# Altium PCB BOARD.PcbDoc
Units mm, origin at the board's own origin, x right, y up, seen from the top; angles counter-clockwise.
Board outline 100 x 50 mm, 2 copper layers (Top Layer, Bottom Layer); 33 components, 28 nets, 123 pads, 30 vias.
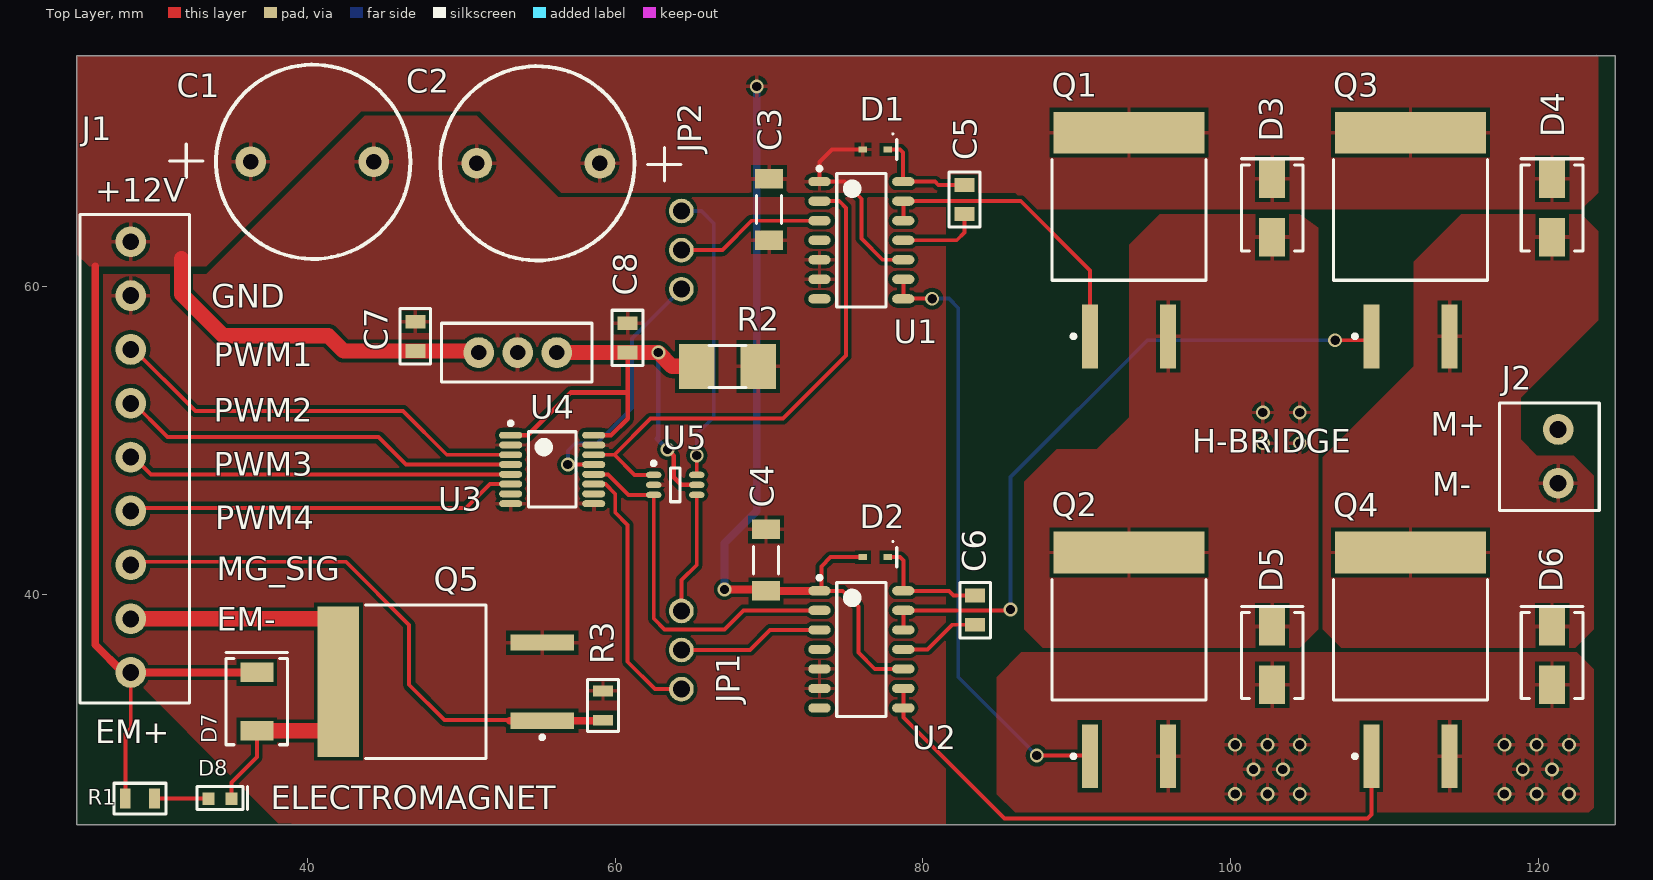
[diagram p0: Top Layer view]
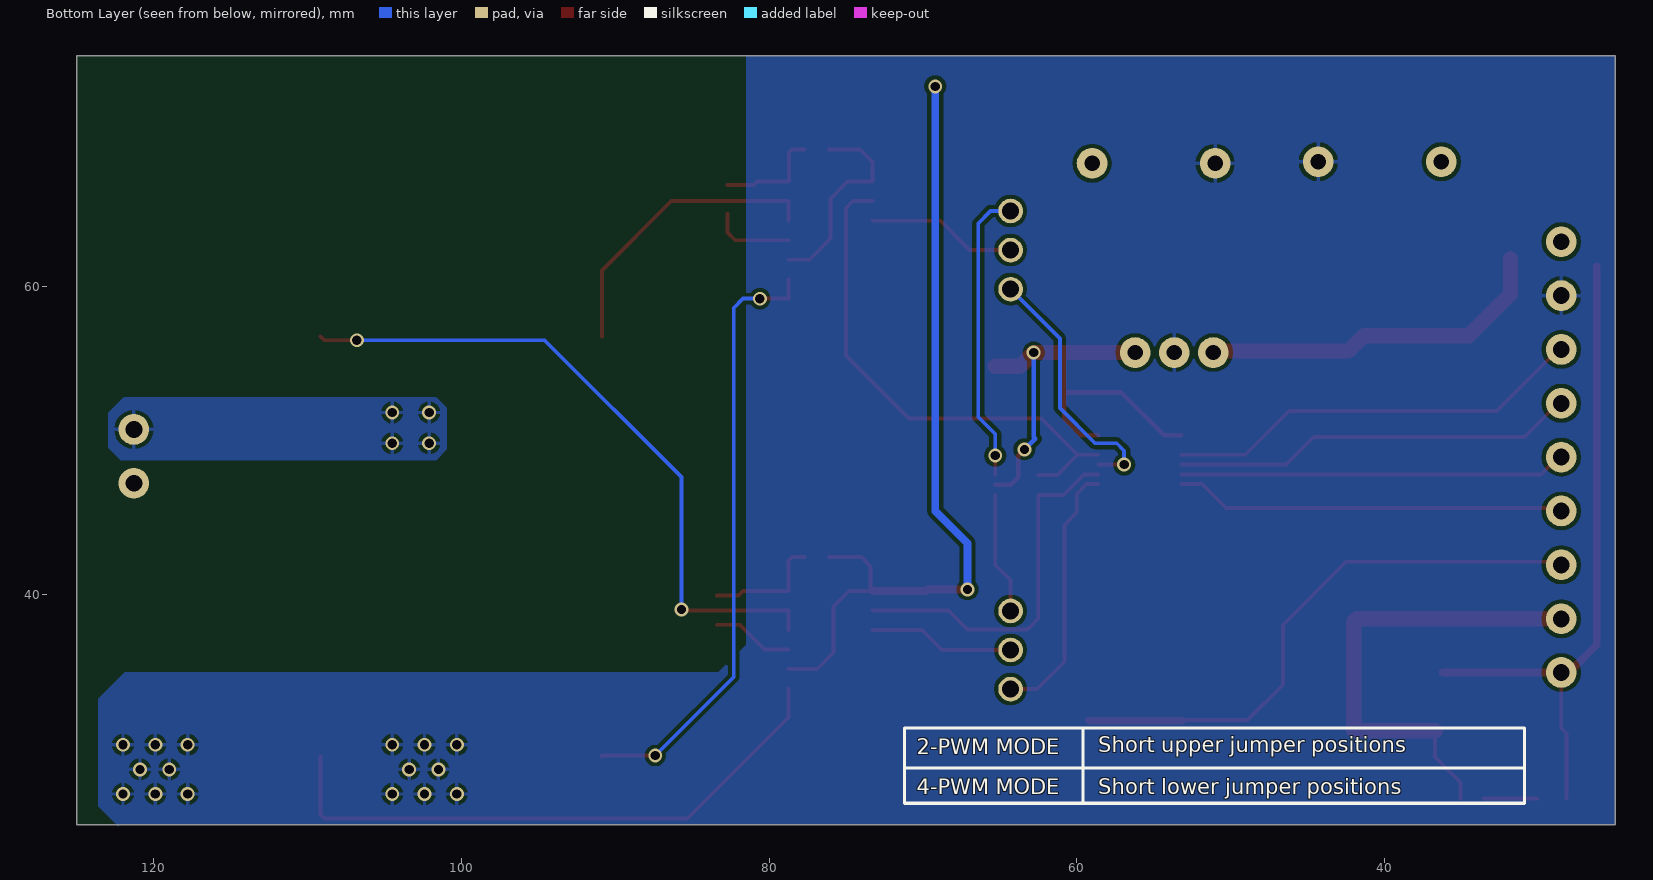
[diagram p1: Bottom Layer view, seen from below]
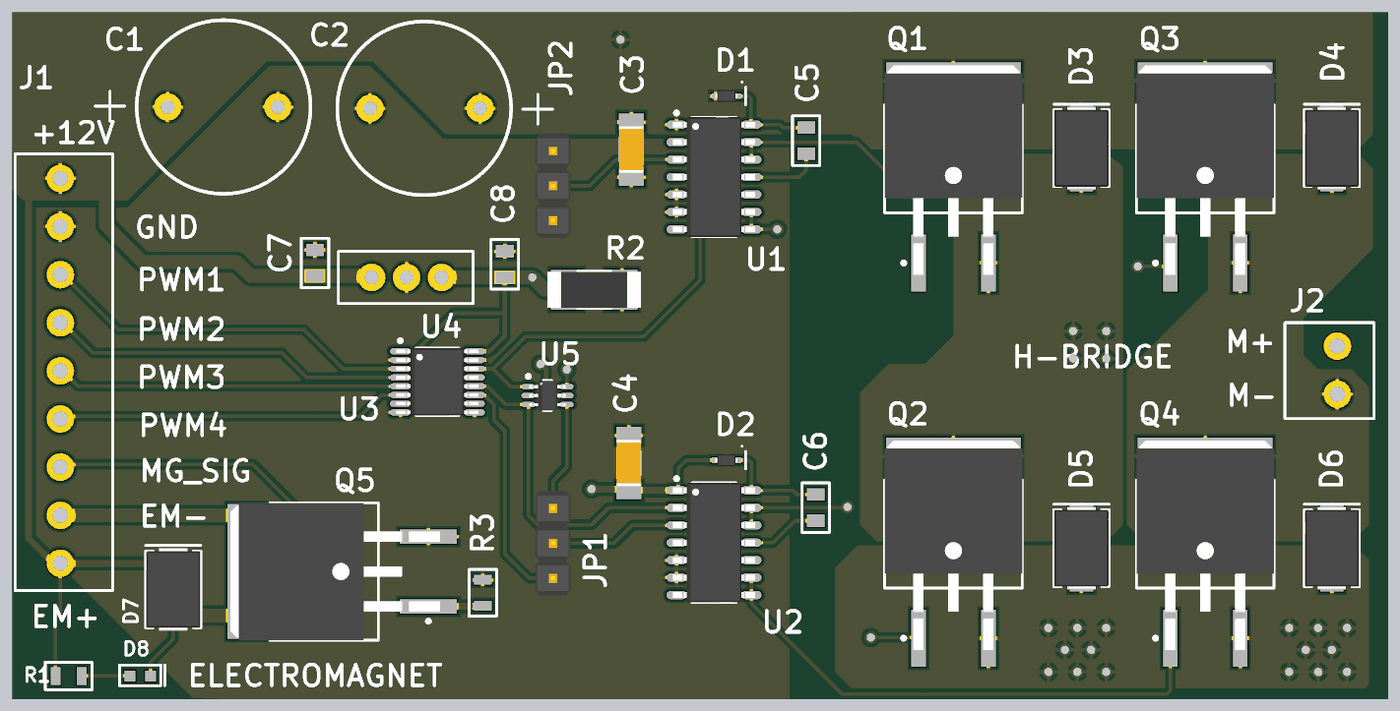
[diagram p2: 3D render of the assembled board from above, using the file's embedded part models]

## Layer stack, top to bottom
Top Solder: solder mask 0.0102, Solder Resist, Dk 3.5
Top Layer: signal copper 0.0356
Dielectric 1: dielectric 0.32, FR-4, Dk 4.8
Bottom Layer: signal copper 0.0356
Bottom Solder: solder mask 0.0102, Solder Resist, Dk 3.5

## Board outline
25,25 125,25 125,75 25,75

## Design rules (kind name [scope] priority, off if disabled: settings)
Clearance [All] p1: gap=0.254 ignorepadtopadclearanceinfootprint=FALSE except(0: Arc-Hole Track-Hole SMDPad-Hole THPad-Hole Via-Hole Fill-Hole Poly-Hole Region-Hole Text-Hole; 0.1: SMDPad-SMDPad SMDPad-THPad THPad-THPad)
ComponentClearance [All] p1: gap=0 collisioncheckmode=3 verticalgap=2540 showdistances=FALSE
PolygonConnect [All] p1: connectstyle=Relief reliefconductorwidth=0.254 reliefentries=4 polygonreliefangle="90 Angle" airgapwidth=0.254
RoutingVias [All] p1: holewidth=0.711 width=1.27 viastyle="Through Hole" minholewidth=0.711 minwidth=1.27 maxholewidth=0.711 maxwidth=1.27
SolderMaskExpansion [All] p1: expansion=0.102
Width [All] p1: maxlimit=2 minlimit=0.254 preferedwidth=0.254
29 further rules are at their usual default settings.

## Components (designator, comment, footprint, x,y, rotation, side; value= is the part's Value field where it differs from the comment)
C1 "UVR2A102MRD6" CAP_THRU 36.3,68.1 r0 top
C2 "UVR2A102MRD6" CAP_THRU 59,68 r180 top
C3 "C3216X5R1E106K160AB" C1206 70,65 r90 top
C4 "C3216X5R1E106K160AB" C1206 69.8,42.2 r270 top
C5 "1uF" C0805 82.7,64.7 r90 top
C6 "1uF" C0805 83.4,38 r90 top
C7 "1uF" C0805 47,57.7 r270 top
C8 "1uF" C0805 60.8,57.6 r270 top
D1 "1N4148X-TP" SOD523 76.9,68.9 r0 top
D2 "1N4148X-TP" SOD523 76.9,42.4 r0 top
D3 "CDBA540-HF" DO214-AC 102.7,65.1 r90 top
D4 "CDBA540-HF" DO214-AC 120.9,65.1 r90 top
D5 "CDBA540-HF" DO214-AC 102.7,36 r90 top
D6 "CDBA540-HF" DO214-AC 120.9,36 r90 top
D7 "S3BB-TP" DO-214AA_Diode 36.7,33 r90 top
D8 "LTST-C191TBKT-5A" LED_0603 34.3,26.7 r0 top
J1 "0393570009" 9POS_CONNECTOR 28.5,62.9 r270 top
J2 "ED555/2DS" 2POS_CONNECTOR 121.3,47.2 r90 top
JP1 "732-5316-ND" 3PIN_HEADER 64.3,36.36 r270 top
JP2 "732-5316-ND" 3PIN_HEADER 64.3,62.36 r90 top
Q1 "IRFZ44ESTRLPBF" D2PAK 93.4,63 r90 top
Q2 "IRFZ44ESTRLPBF" D2PAK 93.4,35.7 r90 top
Q3 "IRFZ44ESTRLPBF" D2PAK 111.7,63 r90 top
Q4 "IRFZ44ESTRLPBF" D2PAK 111.7,35.7 r90 top
Q5 "IRFZ44ESTRLPBF" D2PAK 49,34.3 r180 top
R1 "1k" R0805 29.1,26.7 r180 top
R2 "50R" R2512 67.3,54.8 r180 top
R3 "1k" R0805 59.2,32.75 r270 top
U1 "LT1160IS#PBF" SOIC-14 76,63 r0 top
U2 "LT1160IS#PBF" SOIC-14 76,36.4 r0 top
U3 "SI8645BA-B-IUR" QSOP-16 55.9,48.1 r0 top
U4 "DCDC" DCDC 51.12,55.7 r0 top
U5 "NC7WZ14P6X" TSOP-6 63.9,47.1 r0 top

## Footprints (in the part's own frame and the unit in brackets; to place one, negate y for a bottom-side part, rotate by r counter-clockwise, add the part's x,y. Pads: shape width x height; smd on the part's side, far side on the other; paste and mask are expansions set on the pad)
2POS_CONNECTOR [mm]
  round 2 hole 1.1: 1(0,0) 2(3.5,0)
  silkscreen extent -1.78,-2.67 5.21,3.81
3PIN_HEADER [mm]
  round 1.6 hole 1.1: 1(-2.54,0) 2(0,0) 3(2.54,0)
  body extent -3.81,-1.27 3.81,1.27, height 9.5
9POS_CONNECTOR [mm]
  round 2 hole 1.1: 1(0,0) 2(3.5,0) 3(7,0) 4(10.5,0) 5(14,0) 6(17.5,0) 7(21,0) 8(24.511,0) 9(28,0)
  silkscreen extent -1.78,-3.3 29.97,3.81
C0805 [mm]
  rect 0.9x1.3 smd: 1(0,0) 2(1.9,0)
  silkscreen extent -0.85,-1 2.75,1
C1206 [mm] "Chip Capacitor, 2-Leads, Body 3.20x1.60mm, IPC Medium Density"
  rect 1.27x1.82 smd: 1(-2,0) 2(2,0)
  silkscreen extent -0.9,-0.81 0.9,0.81, body extent -1.7,-0.9 1.7,0.9, height 1.8
CAP_THRU [mm]
  round 2 hole 1: 1(0,0) 2(8,0)
  silkscreen extent -5.27,-6.31 10.38,6.31
D2PAK [mm]
  rect 4.15x1.05 smd: 1(-6.25,2.54) 3(-6.25,-2.54)
  rect 2.7x9.8 smd: 2(7,0)
  silkscreen extent -6.37,-5 5.25,5, body extent -7.1,-5 8.14,5, height 4.83
DCDC [mm]
  round 2 hole 1: 1(0,0) 2(2.54,0) 3(5.08,0)
  silkscreen extent -2.41,-1.91 7.37,1.91
DO214-AC [mm]
  rect 2.5x1.7 smd: 1(-1.9,0) 2(1.9,0)
  silkscreen extent -2.8,-2 3.2,2, body extent -3.02,-1.97 3.02,1.97, height 2.62
DO-214AA_Diode [mm] "Molded Diode, 2-Leads, Body 5.33x3.62mm, IPC Medium Density"
  rect 1.27x2.15 smd: 1(-1.9,0) 2(1.9,0)
  silkscreen extent -2.8,-2 3.2,2, body extent -3.02,-1.97 3.02,1.97, height 2.62
LED_0603 [mm]
  rect 0.8x0.8 smd: 1(-0.75,0) 2(0.75,0)
  silkscreen extent -1.5,-0.7 1.8,0.8
QSOP-16 [mm] "SOP, 16-Leads, Body 4.89x3.90mm, Pitch 0.64mm, IPC Medium Density"
  oval 1.5x0.45 smd: 1(-2.7,2.222) 2(-2.7,1.587) 3(-2.7,0.953) 4(-2.7,0.318) 5(-2.7,-0.318) 6(-2.7,-0.953) 7(-2.7,-1.587) 8(-2.7,-2.222) 9(2.7,-2.222) 10(2.7,-1.587) 11(2.7,-0.953) 12(2.7,-0.318) 13(2.7,0.318) 14(2.7,0.953) 15(2.7,1.587) 16(2.7,2.222)
  silkscreen extent -2.82,-2.45 1.55,3.12, body extent -3,-2.45 3,2.45, height 1.75
R0805 [mm]
  rect 0.7x1.3 smd: 1(-0.95,0) 2(0.95,0)
  silkscreen extent -1.7,-1 1.7,1
R2512 [mm] "Chip Resistor, 2-Leads, Body 6.30x2.50mm, IPC Medium Density"
  rect 2.29x2.92 smd: 1(-2,0) 2(2,0)
  silkscreen extent -1.2,-1.36 1.2,1.36, body extent -3.4,-1.3 3.4,1.3, height 2.79
SOD523 [mm] "SODFL, 2-Leads, Body 0.80x1.60mm, IPC Medium Density"
  rect 0.55x0.4 smd: 1(-0.8,0) 2(0.8,0)
  silkscreen extent 1.09,-0.64 1.4,1.07, body extent -0.8,-0.43 0.8,0.43, height 0.77
SOIC-14 [mm] "SOIC, 14-Leads, Body 8.65x3.90mm, Pitch 1.27mm, IPC Medium Density"
  oval 1.45x0.6 smd: 1(-2.725,3.81) 2(-2.725,2.54) 3(-2.725,1.27) 4(-2.725,0) 5(-2.725,-1.27) 6(-2.725,-2.54) 7(-2.725,-3.81) 8(2.725,-3.81) 9(2.725,-2.54) 10(2.725,-1.27) 11(2.725,0) 12(2.725,1.27) 13(2.725,2.54) 14(2.725,3.81)
  silkscreen extent -2.85,-4.35 1.6,4.78, body extent -3,-4.35 3,4.35, height 1.75
TSOP-6 [mm] "TSOP, 6-Leads, Body 2.00x1.25mm, Pitch 0.65mm, IPC Medium Density"
  oval 1x0.4 smd: 1(-1.4,0.65) 2(-1.4,0) 3(-1.4,-0.65) 4(1.4,-0.65) 5(1.4,0) 6(1.4,0.65)
  silkscreen extent -1.52,-1.1 0.3,1.52, body extent -1.33,-1.1 1.33,1.1, height 0.8

## Part data
C1 C2: "CAP Electrolytic 1000uF 100V", Capacitance=1000uF, Case/Package=Radial, Manufacturer=Nichicon, Max Operating Temperature=85°C, Min Operating Temperature=-40°C, Package Quantity=50, Ripple Current=1.38A, Supplier Part Number 1=493-14310-ND, Tolerance=20%, Voltage Rating=100V, ComponentLink1Description=http://www.mouser.com/ds/2/293/e-uvr-1076495.pdf, ComponentLink1URL=http://www.mouser.com/ds/2/293/e-uvr-1076495.pdf, ComponentLink2Description=http://nichicon-us.com/english/products/pdfs/e-uvr.pdf, ComponentLink2URL=http://nichicon-us.com/english/products/pdfs/e-uvr.pdf, Dissipation Factor=0.08%, Lead/Base Style=Straight, Lead Pitch=7.5mm, Length=35mm, Life (Hours)=2000Hour, Manufacturer Part Number=UVR2A102MRD6, Mount="Through Hole", Packaging=Bulk, Polarity=Polar, Pricing 1="1=1.84, 10=1.492, 100=1.1391, 500=0.8679, 1000=0.7594, 2500=0.7323, 5000=0.7052 (USD)", Stock 1=1438, Supplier 1=Digi-Key, Termination=Radial, Voltage Rating (DC)=100V
C3 C4: "CAP MLCC 10µF ±10% 25V X5R Ceramic Capacitor -55°C ~ 85°C Surface Mount, MLCC 1206 (3216 Metric) 0.126\" L x 0.063\" W (3.20mm x 1.60mm)", Capacitance=10uF, Case/Package=1206, Case Code (Metric)=3216, Dielectric=X5R, Dielectric Material=Ceramic, Manufacturer=TDK, Max Operating Temperature=85°C, Min Operating Temperature=-55°C, Package Quantity=2000, Supplier Part Number 1=445-6862-1-ND, Tolerance=10%, Voltage Rating=25V, Case Code (Imperial)=1206, ComponentLink1Description=https://datasheet.ciiva.com/6276/tdkmlcccaprange-6276583.pdf, ComponentLink1URL=https://datasheet.ciiva.com/6276/tdkmlcccaprange-6276583.pdf, ComponentLink2Description=https://datasheet.ciiva.com/17487/e412-c-17487288.pdf, ComponentLink2URL=https://datasheet.ciiva.com/17487/e412-c-17487288.pdf, ComponentLink3Description=https://datasheet.ciiva.com/24217/c3216x5r1e106k160ab-265309-24217784.pdf, ComponentLink3URL=https://datasheet.ciiva.com/24217/c3216x5r1e106k160ab-265309-24217784.pdf, ComponentLink4Description=https://datasheet.ciiva.com/6276/tdkmlcccaprange-6276585.pdf, ComponentLink4URL=https://datasheet.ciiva.com/6276/tdkmlcccaprange-6276585.pdf, ComponentLink5Description=https://datasheet.ciiva.com/6276/tdkmlcccaprange-6276587.pdf, ComponentLink5URL=https://datasheet.ciiva.com/6276/tdkmlcccaprange-6276587.pdf, Composition=Ceramic, Depth=1.6mm, Height=1.6mm, Lead Free="Lead Free", Length=3.2mm, Manufacturer Part Number=C3216X5R1E106K160AB, Mount="Surface Mount", Number of Pins=2, Packaging="Tape and Reel", Pricing 1="1=0.83, 10=0.589, 100=0.3881, 500=0.2875, 1000=0.2444 (USD)", Radiation Hardening=No, Stock 1=3130, Supplier 1=Digi-Key, Termination=SMD/SMT, Thickness=0.075inch, Voltage Rating (DC)=25V, Weight=0.000571oz, Width=0.063inch
C5 C6: library part GCM21BR71E105KA56L, "CAP MLCC 1UF 25V X7R 0805", Case/Package=0805, Case Code (Metric)=2012, Dielectric=X7R, Manufacturer=Murata, Max Operating Temperature=125°C, Min Operating Temperature=-55°C, Package Quantity=3000, Supplier Part Number 1=490-4785-1-ND, Tolerance=10%, Voltage=25V, Capacitance=1uF, Case Code (Imperial)=0805, ComponentLink1Description=https://datasheet.ciiva.com/137/product-137200.pdf, ComponentLink1URL=https://datasheet.ciiva.com/137/product-137200.pdf, ComponentLink2Description=https://datasheet.ciiva.com/3778/359gcm21br71e105ka5623-3778560.pdf, ComponentLink2URL=https://datasheet.ciiva.com/3778/359gcm21br71e105ka5623-3778560.pdf, ComponentLink3Description=https://datasheet.ciiva.com/16624/product-16624576.pdf, ComponentLink3URL=https://datasheet.ciiva.com/16624/product-16624576.pdf, ComponentLink4Description=https://datasheet.ciiva.com/18183/getdatasheetpartid-153106-18183696.pdf, ComponentLink4URL=https://datasheet.ciiva.com/18183/getdatasheetpartid-153106-18183696.pdf, ComponentLink5Description=https://datasheet.ciiva.com/137/product-137201.pdf, ComponentLink5URL=https://datasheet.ciiva.com/137/product-137201.pdf, ComponentLink6Description=https://datasheet.ciiva.com/11789/0900766b80ef92d0-11789092.pdf, ComponentLink6URL=https://datasheet.ciiva.com/11789/0900766b80ef92d0-11789092.pdf, ComponentLink7Description=https://datasheet.ciiva.com/2989/product-2989245.pdf, ComponentLink7URL=https://datasheet.ciiva.com/2989/product-2989245.pdf, ComponentLink8Description=https://datasheet.ciiva.com/2989/product-2989246.pdf, ComponentLink8URL=https://datasheet.ciiva.com/2989/product-2989246.pdf, ComponentLink9Description=https://datasheet.ciiva.com/137/product-137199.pdf, ComponentLink9URL=https://datasheet.ciiva.com/137/product-137199.pdf, Depth=1.25mm, Height=1.25mm, Lead Free="Lead Free", Length=2mm, Manufacturer Part Number=GCM21BR71E105KA56L, Mount="Surface Mount", Packaging="Tape and Reel", Pricing 1="1=0.25, 10=0.171, 100=0.0865, 500=0.0592, 1000=0.0524 (USD)", Radiation Hardening=No, REACH SVHC="No SVHC", Stock 1=30000, Supplier 1=Digi-Key, Termination=SMD/SMT, Thickness=0.055inch, Voltage Rating=25V, Voltage Rating (DC)=25V, Width=0.049inch
C7 C8: library part 0805ZC105KAT2A, "CAP CER 1UF 10V X7R 0805", Case/Package=0805, Case Code (Metric)=2012, Dielectric=X7R, Insulation Resistance=100GR, Manufacturer="Kyocera AVX", Max Operating Temperature=125°C, Min Operating Temperature=-55°C, Package Quantity=1, Supplier Part Number 1=478-1405-1-ND, Tolerance=10%, Voltage=10V, Capacitance=1uF, Case Code (Imperial)=0805, ComponentLink1Description=https://datasheet.ciiva.com/2988/cx7r-2988071.pdf, ComponentLink1URL=https://datasheet.ciiva.com/2988/cx7r-2988071.pdf, ComponentLink2Description=https://datasheet.ciiva.com/2988/cx7r-2988072.pdf, ComponentLink2URL=https://datasheet.ciiva.com/2988/cx7r-2988072.pdf, ComponentLink3Description=https://datasheet.ciiva.com/14601/70001075-14601048.pdf, ComponentLink3URL=https://datasheet.ciiva.com/14601/70001075-14601048.pdf, ComponentLink4Description=https://datasheet.ciiva.com/14594/70001075-14594329.pdf, ComponentLink4URL=https://datasheet.ciiva.com/14594/70001075-14594329.pdf, ComponentLink5Description=https://datasheet.ciiva.com/25901/cx7r-25901193.pdf, ComponentLink5URL=https://datasheet.ciiva.com/25901/cx7r-25901193.pdf, ComponentLink6Description=https://datasheet.ciiva.com/15165/getdatasheetpartid-71567-15165451.pdf, ComponentLink6URL=https://datasheet.ciiva.com/15165/getdatasheetpartid-71567-15165451.pdf, ComponentLink7Description=https://datasheet.ciiva.com/151/cx7r-151916.pdf, ComponentLink7URL=https://datasheet.ciiva.com/151/cx7r-151916.pdf, ComponentLink8Description=https://datasheet.ciiva.com/151/cx7r-151917.pdf, ComponentLink8URL=https://datasheet.ciiva.com/151/cx7r-151917.pdf, ComponentLink9Description=https://datasheet.ciiva.com/151/cx7r-151918.pdf, ComponentLink9URL=https://datasheet.ciiva.com/151/cx7r-151918.pdf, ComponentLink10Description=https://datasheet.ciiva.com/11787/0900766b80ed4be2-11787102.pdf, ComponentLink10URL=https://datasheet.ciiva.com/11787/0900766b80ed4be2-11787102.pdf, ComponentLink11Description=https://datasheet.ciiva.com/7812/84526-7812223.pdf, ComponentLink11URL=https://datasheet.ciiva.com/7812/84526-7812223.pdf, ComponentLink12Description=https://datasheet.ciiva.com/19475/2011248-19475855.pdf, ComponentLink12URL=https://datasheet.ciiva.com/19475/2011248-19475855.pdf, Contact Plating=Tin,Matte, Depth=1.25mm, Dissipation Factor=5%, Height=1.4mm, Lead Free="Lead Free", Length=2.01mm, Manufacturer Part Number=0805ZC105KAT2A, Mount="Surface Mount,PCB", Number of Pins=2, Packaging="Tape and Reel", Pricing 1="1=0.21, 10=0.147, 100=0.069, 500=0.0484, 1000=0.0401 (USD)", Radiation Hardening=No, REACH SVHC="No SVHC", Stock 1=385183, Supplier 1=Digi-Key, Termination=SMD/SMT, Thickness=0.055inch, Voltage Rating=10V, Voltage Rating (DC)=10V, Width=1.25mm
D1 D2: "DIODE GEN PURP 75V 150MA SOD523", Average Rectified Current=150mA, Capacitance=2pF, Forward Current=300mA, Forward Voltage=1.25V, Manufacturer=MCC, Max Operating Temperature=150°C, Max Repetitive Reverse Voltage (Vrrm)=100V, Max Reverse Leakage Current=1uA, Max Reverse Voltage (DC)=75V, Max Surge Current=2A, Min Operating Temperature=-65°C, Package Quantity=1, Power Dissipation=200mW, Supplier Part Number 1=1N4148XTPMSCT-ND, ComponentLink1Description=https://datasheet.ciiva.com/911/1n4148xsod-523-911686.pdf, ComponentLink1URL=https://datasheet.ciiva.com/911/1n4148xsod-523-911686.pdf, ComponentLink2Description=https://datasheet.ciiva.com/4435/1n4148xsod-523-358-4435190.pdf, ComponentLink2URL=https://datasheet.ciiva.com/4435/1n4148xsod-523-358-4435190.pdf, ComponentLink3Description=https://datasheet.ciiva.com/911/1n4148xsod-523-911687.pdf, ComponentLink3URL=https://datasheet.ciiva.com/911/1n4148xsod-523-911687.pdf, ComponentLink4Description=https://datasheet.ciiva.com/911/1n4148xsod-523-911688.pdf, ComponentLink4URL=https://datasheet.ciiva.com/911/1n4148xsod-523-911688.pdf, ComponentLink5Description=https://datasheet.ciiva.com/16836/1n4148xsod-523-16836299.pdf, ComponentLink5URL=https://datasheet.ciiva.com/16836/1n4148xsod-523-16836299.pdf, Current Rating=150mA, Element Configuration=Single, Lead Free="Lead Free", Manufacturer Part Number=1N4148X-TP, Mount="Surface Mount", Number of Pins=2, Output Current=300mA, Packaging="Tape and Reel", Peak Non-Repetitive Surge Current=2A, Polarity=Standard, Pricing 1="1=0.14, 10=0.131, 100=0.0856, 500=0.0419, 1000=0.0285 (USD)", Radiation Hardening=No, Recovery Time=4ns, Reverse Recovery Time=4ns, Stock 1=978848, Supplier 1=Digi-Key, Voltage Rating (DC)=75V
D3 D4 D5 D6: "DIODE Schottky Diodes & Rectifiers 40V, 5A", Average Rectified Current=5A, Manufacturer=Comchip, Max Reverse Voltage (DC)=40V, Supplier Part Number 1=641-1707-1-ND, ComponentLink1Description=http://www.mouser.com/ds/2/80/CDBA520-HF%20Thru134737.%20CDBA5200-HF%20RevB-221146.pdf, ComponentLink1URL=http://www.mouser.com/ds/2/80/CDBA520-HF%20Thru134737.%20CDBA5200-HF%20RevB-221146.pdf, ComponentLink2Description=http://www.comchiptech.com/cms/UserFiles/CDBA540-HF%20Thru505315.%20CDBA5200-HF%20RevC.pdf, ComponentLink2URL=http://www.comchiptech.com/cms/UserFiles/CDBA540-HF%20Thru505315.%20CDBA5200-HF%20RevC.pdf, Manufacturer Part Number=CDBA540-HF, Mount="Surface Mount", Packaging="Tape and Reel", Pricing 1="1=0.49, 10=0.381, 100=0.2612, 500=0.1791, 1000=0.1343 (USD)", Stock 1=61079, Supplier 1=Digi-Key
D7: "DIODE GEN PURP 100V 3A DO214AA", Average Rectified Current=3A, Forward Voltage=1.15V, Manufacturer=MCC, Max Repetitive Reverse Voltage (Vrrm)=100V, Max Surge Current=100A, Package Quantity=1, Peak Reverse Current=10uA, Supplier Part Number 1=S3BB-TPMSCT-ND, ComponentLink1Description=https://datasheet.ciiva.com/914/s3ab-s3mbsmb-914278.pdf, ComponentLink1URL=https://datasheet.ciiva.com/914/s3ab-s3mbsmb-914278.pdf, ComponentLink2Description=https://datasheet.ciiva.com/914/s3ab-s3mbsmb-914279.pdf, ComponentLink2URL=https://datasheet.ciiva.com/914/s3ab-s3mbsmb-914279.pdf, ComponentLink3Description=https://datasheet.ciiva.com/914/s3ab-s3mbsmb-914280.pdf, ComponentLink3URL=https://datasheet.ciiva.com/914/s3ab-s3mbsmb-914280.pdf, ComponentLink4Description=https://datasheet.ciiva.com/15200/getdatasheetpartid-686538-15200554.pdf, ComponentLink4URL=https://datasheet.ciiva.com/15200/getdatasheetpartid-686538-15200554.pdf, ComponentLink5Description=https://datasheet.ciiva.com/17437/s3ab-s3mbsmb-17437836.pdf, ComponentLink5URL=https://datasheet.ciiva.com/17437/s3ab-s3mbsmb-17437836.pdf, Element Configuration=Single, Lead Free="Lead Free", Manufacturer Part Number=S3BB-TP, Mount="Surface Mount", Number of Pins=2, Packaging="Tape and Reel", Peak Non-Repetitive Surge Current=100A, Pricing 1="1=0.56, 10=0.441, 25=0.372, 100=0.3028, 250=0.2509, 500=0.2076, 1000=0.1557 (USD)", Radiation Hardening=No, Reverse Voltage (DC)=100V, Stock 1=10943, Supplier 1=Digi-Key
D8: "LED BLUE CLEAR 0603 SMD", Case/Package=0603, Case Code (Metric)=1608, Colour=Blue, Forward Current=20mA, Forward Voltage=2.8V, Lens Colour=Colorless, Manufacturer="Vishay Lite-On", Max Operating Temperature=80°C, Min Operating Temperature=-20°C, Package Quantity=5000, Supplier Part Number 1=160-2212-6-ND, Test Current=5mA, Voltage=29V, Case Code (Imperial)=0603, ComponentLink1Description=http://components.arrow.com/part/dataview/52218576S9813001N1331, ComponentLink1URL=http://components.arrow.com/part/dataview/52218576S9813001N1331, ComponentLink2Description=http://optoelectronics.liteon.com/zh-cn/api/DwonloadFileHandler.ashx?txtSpecNo=DS22-2003-020&txtPartNo=LTST-C191TBKT-5A, ComponentLink2URL=http://optoelectronics.liteon.com/zh-cn/api/DwonloadFileHandler.ashx?txtSpecNo=DS22-2003-020&txtPartNo=LTST-C191TBKT-5A, Dominant Wavelength=473nm, Height=0.55mm, Illumination Colour=Blue, Length=1.6mm, Lens Style=Diffused,Colorless,Rectangular, Lens Transparency=Clear, Luminous Intensity=15mcd, Manufacturer Part Number=LTST-C191TBKT-5A, Mount="Surface Mount", Number of LEDs=1, Packaging="Tape and Reel", Pricing 1="1=0.52, 10=0.376, 25=0.2884, 100=0.1881, 250=0.138, 500=0.117, 1000=0.0961, 2500=0.0836 (USD)", Radiation Hardening=No, Stock 1=2918, Supplier 1=Digi-Key, Viewing Angle=130°, Width=0.8mm
J1: "CONN TERMINAL BLOCK 9POS 3.5MM", Colour=Black, Current=12A, Manufacturer=Molex, Max Operating Temperature=105°C, Min Operating Temperature=-40°C, Supplier Part Number 1=WM7865-ND, Voltage=300V, ComponentLink1Description=https://datasheet.ciiva.com/9364/0393570009-terminal-blocks-9364872.pdf, ComponentLink1URL=https://datasheet.ciiva.com/9364/0393570009-terminal-blocks-9364872.pdf, ComponentLink2Description=https://datasheet.ciiva.com/18620/393570005-sd-18620844.pdf, ComponentLink2URL=https://datasheet.ciiva.com/18620/393570005-sd-18620844.pdf, Contact Plating=Tin, Housing Colour=Black, Housing Material=Nylon, Manufacturer Part Number=0393570009, Mount="Through Hole", Number of Contacts=9, Number of Levels=1, Number of Positions Per Level=9, Number of Rows=1, Orientation=Straight, Packaging=Bulk, Pitch=0.138inch, Plating=Nickel, Pricing 1="1=3.12, 10=2.362, 25=2.1888, 50=1.968, 100=1.92, 250=1.68, 500=1.536, 1000=1.392, 5000=1.224 (USD)", Stock 1=4496, Supplier 1=Digi-Key, Termination=Screw, Wire Gauge (Max)=28AWG, Wire Gauge (Min)=16AWG
J2: "TERMINAL BLOCK 3.5MM 2POS PCB", Colour=Grey, Current=6A, Flammability Rating="UL94 V-0", Manufacturer="On-Shore Technology", Max Operating Temperature=105°C, Min Operating Temperature=-30°C, Supplier Part Number 1=ED1514-ND, Voltage=150V, ComponentLink1Description=https://datasheet.ciiva.com/823/ed555ds-823583.pdf, ComponentLink1URL=https://datasheet.ciiva.com/823/ed555ds-823583.pdf, Contact Material=Brass, Contact Plating=Brass, Height=8.2mm, Housing Colour=Grey, Housing Material=Nylon, Lead Free="Lead Free", Length=7mm, Manufacturer Part Number=ED555/2DS, Mount="Through Hole", Number of Levels=1, Number of Pins=2, Number of Positions=2, Number of Positions Per Level=2, Number of Rows=1, Packaging=Bulk, Pitch=0.138inch, Plating=Steel, Pricing 1="1=1.06, 10=0.658, 25=0.5632, 50=0.5064, 100=0.4959, 250=0.422, 500=0.4009, 1000=0.3587, 5000=0.2806 (USD)", Stock 1=38938, Supplier 1=Digi-Key, Termination=Screw, Width=6.2mm, Wire Gauge (Max)=28AWG, Wire Gauge (Min)=16AWG
JP1 JP2: library part 61300311121, "CONN_HeaderPins3pos WURTH ELEKTRONIK Board-To-Board Connector, Vertical, WR-PHD Series, Through Hole, Header, 3 Contacts, 2.54 mm", Case/Package=100, Colour=Black, Manufacturer="Wurth Electronics", ComponentLink1Description=http://www.farnell.com/cad/1737268.pdf, ComponentLink1URL=http://www.farnell.com/cad/1737268.pdf, Connector Type="Male Pin", Contact Material=Copper, Contact Mating Length=0.236inch, Contact Plating=Gold, Gender=Male, Lead Free="Lead Free", Manufacturer Part Number=61300311121, Mount="Through Hole", Number of Contacts=3, Number of Positions=3, Number of Rows=1, Packaging=Bulk, Pitch=0.1inch, Pricing 1="1=0.13, 10=0.106, 25=0.088, 50=0.074, 100=0.067, 1000=0.061 (USD)", REACH SVHC=Unknown, Stock 1=57026, Supplier 1=Digi-Key, Supplier Part Number 1=732-5316-ND, Termination=Solder
Q1 Q2 Q3 Q4 Q5: "MOSFET N-CH 60V 48A D2PAK", Case/Package=TO-263-3, Continuous Drain Current (ID)=48A, Drain to Source Breakdown Voltage=60V, Drain to Source Resistance=23mR, Gate to Source Voltage (Vgs)=20V, Input Capacitance=1.36nF, Manufacturer=Infineon, Max Operating Temperature=175°C, Max Power Dissipation=110W, Min Operating Temperature=-55°C, Supplier Part Number 1=IRFZ44ESTRLPBFCT-ND, ComponentLink1Description=https://www.alliedelec.com/m/d/1b68331d905676b420cb8944ec9d0bc2.pdf, ComponentLink1URL=https://www.alliedelec.com/m/d/1b68331d905676b420cb8944ec9d0bc2.pdf, ComponentLink2Description=http://www.infineon.com/dgdl/irfz44espbf.pdf?fileId=5546d462533600a40153563b2c662208, ComponentLink2URL=http://www.infineon.com/dgdl/irfz44espbf.pdf?fileId=5546d462533600a40153563b2c662208, ComponentLink3Description=http://www.irf.com/product-info/datasheets/data/irfz44espbf.pdf, ComponentLink3URL=http://www.irf.com/product-info/datasheets/data/irfz44espbf.pdf, Contact Plating=Tin,Matte, Drain to Source Voltage (Vdss)=60V, Height=0.19inch, Lead Free="Lead Free", Length=0.42inch, Manufacturer Part Number=IRFZ44ESTRLPBF, Mount="Surface Mount", Number of Pins=3, Packaging="Tape and Reel", Power Dissipation=110W, Pricing 1="1=1.61, 10=1.43, 100=1.1304 (USD)", Rds On Max=23mR, Rise Time=60ns, Stock 1=600, Supplier 1=Digi-Key, Turn-Off Delay Time=70ns, Turn-On Delay Time=12ns, Width=0.38inch
R1 R3: library part ERA-6AEB102V, "RES SMD 1K OHM 0805 1K Ohm 0.1% 0.125W(1/8W) ±25ppm/C Molded SMD Automotive Punched T/R", Case/Package=0805, Case Code (Metric)=2012, Manufacturer="Panasonic ECG", Max Operating Temperature=155°C, Max Power Dissipation=125mW, Min Operating Temperature=-55°C, Package Quantity=5000, Resistance=1kR, Supplier Part Number 1=P1.0KDACT-ND, Temperature Coefficient=25ppm/°C, Tolerance=0.1%, Voltage Rating=100V, Case Code (Imperial)=0805, ComponentLink1Description=https://datasheet.ciiva.com/11811/0900766b80beefcc-11811155.pdf, ComponentLink1URL=https://datasheet.ciiva.com/11811/0900766b80beefcc-11811155.pdf, ComponentLink2Description=https://datasheet.ciiva.com/30057/54aoa0000ce26-30057591.pdf, ComponentLink2URL=https://datasheet.ciiva.com/30057/54aoa0000ce26-30057591.pdf, ComponentLink3Description=https://datasheet.ciiva.com/48536/era-eng-tds-48536727.pdf, ComponentLink3URL=https://datasheet.ciiva.com/48536/era-eng-tds-48536727.pdf, ComponentLink4Description=https://datasheet.ciiva.com/9198/aoa0000ce26-9198984.pdf, ComponentLink4URL=https://datasheet.ciiva.com/9198/aoa0000ce26-9198984.pdf, ComponentLink5Description=https://datasheet.ciiva.com/16782/70068849-16782808.pdf, ComponentLink5URL=https://datasheet.ciiva.com/16782/70068849-16782808.pdf, ComponentLink6Description=https://datasheet.ciiva.com/24025/aoa0000ce26-197354-24025849.pdf, ComponentLink6URL=https://datasheet.ciiva.com/24025/aoa0000ce26-197354-24025849.pdf, ComponentLink7Description=https://datasheet.ciiva.com/43455/485442-43455257.pdf, ComponentLink7URL=https://datasheet.ciiva.com/43455/485442-43455257.pdf, ComponentLink8Description=https://datasheet.ciiva.com/43457/485442-43457803.pdf, ComponentLink8URL=https://datasheet.ciiva.com/43457/485442-43457803.pdf, ComponentLink9Description=https://datasheet.ciiva.com/7942/485442-7942414.pdf, ComponentLink9URL=https://datasheet.ciiva.com/7942/485442-7942414.pdf, ComponentLink10Description=https://datasheet.ciiva.com/16201/aoa0000ce26-16201486.pdf, ComponentLink10URL=https://datasheet.ciiva.com/16201/aoa0000ce26-16201486.pdf, ComponentLink11Description=https://datasheet.ciiva.com/22783/485442-22783806.pdf, ComponentLink11URL=https://datasheet.ciiva.com/22783/485442-22783806.pdf, ComponentLink12Description=https://datasheet.ciiva.com/7942/485442-7942415.pdf, ComponentLink12URL=https://datasheet.ciiva.com/7942/485442-7942415.pdf, ComponentLink13Description=https://datasheet.ciiva.com/29184/453027-da-01-en-widerstand-0805-era-29184108.pdf, ComponentLink13URL=https://datasheet.ciiva.com/29184/453027-da-01-en-widerstand-0805-era-29184108.pdf, Composition="Thin Film", Contact Plating=Tin, Depth=1.25mm, Height=0.5mm, Length=2mm, Manufacturer Part Number=ERA-6AEB102V, Military Standard=Not, Mount="Surface Mount", Number of Pins=2, Number of Terminations=2, Packaging="Tape and Reel", Power Rating=125mW, Pricing 1="1=0.36, 10=0.302, 100=0.1182, 1000=0.0495, 2500=0.0454 (USD)", Radiation Hardening=No, REACH SVHC="No SVHC", Stock 1=506583, Supplier 1=Digi-Key, Termination=SMD/SMT, Width=1.25mm
R2: library part WSC251550R00FEA, "RES SMD 50 OHM 1% 1W 2515", Case/Package=2515, Case Code (Metric)=6438, Manufacturer="Vishay Dale", Max Operating Temperature=275°C, Max Power Dissipation=1W, Min Operating Temperature=-65°C, Package Quantity=1, Supplier Part Number 1=WSCB-50CT-ND, Temperature Coefficient=20ppm/°C, Tolerance=1%, Voltage Rating=7.1V, Voltage Rating (DC)=7.07V, Case Code (Imperial)=2515, ComponentLink1Description=https://datasheet.ciiva.com/2484/wscwsn-2484608.pdf, ComponentLink1URL=https://datasheet.ciiva.com/2484/wscwsn-2484608.pdf, ComponentLink2Description=https://datasheet.ciiva.com/2484/wscwsn-2484609.pdf, ComponentLink2URL=https://datasheet.ciiva.com/2484/wscwsn-2484609.pdf, ComponentLink3Description=https://datasheet.ciiva.com/11812/0900766b80d9a4e3-11812404.pdf, ComponentLink3URL=https://datasheet.ciiva.com/11812/0900766b80d9a4e3-11812404.pdf, ComponentLink4Description=https://datasheet.ciiva.com/7702/wscwsn-7702439.pdf, ComponentLink4URL=https://datasheet.ciiva.com/7702/wscwsn-7702439.pdf, ComponentLink5Description=https://datasheet.ciiva.com/16510/wscwsn-16510183.pdf, ComponentLink5URL=https://datasheet.ciiva.com/16510/wscwsn-16510183.pdf, ComponentLink6Description=https://datasheet.ciiva.com/9002/wscwsn-9002776.pdf, ComponentLink6URL=https://datasheet.ciiva.com/9002/wscwsn-9002776.pdf, ComponentLink7Description=https://datasheet.ciiva.com/22696/1911141-22696987.pdf, ComponentLink7URL=https://datasheet.ciiva.com/22696/1911141-22696987.pdf, ComponentLink8Description=https://datasheet.ciiva.com/28658/1748041-28658109.pdf, ComponentLink8URL=https://datasheet.ciiva.com/28658/1748041-28658109.pdf, ComponentLink9Description=https://datasheet.ciiva.com/16513/wscwsn-16513037.pdf, ComponentLink9URL=https://datasheet.ciiva.com/16513/wscwsn-16513037.pdf, ComponentLink10Description=https://datasheet.ciiva.com/2484/wscwsn-2484607.pdf, ComponentLink10URL=https://datasheet.ciiva.com/2484/wscwsn-2484607.pdf, Composition=Wirewound, Contact Plating=Tin,Matte, Depth=3.81mm, Height=0.125inch, Lead Free="Lead Free", Length=6.35mm, Manufacturer Part Number=WSC251550R00FEA, Military Standard=Not, Number of Terminations=2, Packaging="Tape and Reel", Power Rating=1W, Pricing 1="1=1.67, 10=1.482, 25=1.3744, 50=1.2936, 100=1.1319, 250=0.9702, 500=0.8085, 1000=0.7007 (USD)", Radiation Hardening=No, REACH SVHC="No SVHC", Resistance=50R, Stock 1=8237, Supplier 1=Digi-Key, Width=0.15inch
U1 U2: "IC PWR MOSFET DRIVER N-CH 14SOIC", Case/Package=S, Manufacturer="Analog Devices / Linear Technology", Max Operating Temperature=85°C, Max Output Current=1.5A, Max Supply Voltage=15V, Min Operating Temperature=-40°C, Min Supply Voltage=10V, Operating Supply Voltage=12V, Package Quantity=55, Supplier Part Number 1=LT1160IS#PBF-ND, ComponentLink1Description=https://datasheet.ciiva.com/1951/1303-1951985.pdf, ComponentLink1URL=https://datasheet.ciiva.com/1951/1303-1951985.pdf, ComponentLink2Description=https://datasheet.ciiva.com/15110/getdatasheetpartid-365202-15110225.pdf, ComponentLink2URL=https://datasheet.ciiva.com/15110/getdatasheetpartid-365202-15110225.pdf, Fall Time=140ns, Lead Free="Lead Free", Manufacturer Part Number=LT1160IS#PBF, Number of Drivers=2, Number of Outputs=2, Number of Pins=14, Packaging=Rail/Tube, Pricing 1="1=6.66, 25=4.4244, 100=3.774 (USD)", Radiation Hardening=No, Rise Time=200ns, Stock 1=838, Supplier 1=Digi-Key, Turn-Off Delay Time=600ns, Turn-On Delay Time=500ns
U3: "IC DIGITAL ISOLATOR 4CHANNEL 150MBPS 1000VRMS ISOLATION NO ISOLATED POWER", Case/Package=SSOP, Isolated Power=No, Manufacturer="Silicon Labs", Max Operating Temperature=125°C, Min Operating Temperature=-40°C, Package Quantity=2500, Supplier Part Number 1=SI8645BA-B-IURCT-ND, Channel Type=Unidirectional, ComponentLink1Description=https://datasheet.ciiva.com/8124/si864x-8124729.pdf, ComponentLink1URL=https://datasheet.ciiva.com/8124/si864x-8124729.pdf, ComponentLink2Description=https://datasheet.ciiva.com/15272/si864x-15272845.pdf, ComponentLink2URL=https://datasheet.ciiva.com/15272/si864x-15272845.pdf, Data Rate=150Mbps, Manufacturer Part Number=SI8645BA-B-IUR, Number of Channels=4, Number of Pins=16, Packaging="Tape and Reel", Pricing 1="1=2.51, 25=2.4208, 100=2.3278 (USD)", Propagation Delay=13ns, Pulse Width Distortion (PWD)=4.5ns, Stock 1=2500, Supplier 1=Digi-Key, Type="General Purpose", Weight=0.002931oz
U4: library part R-78E5.0-1.0, "Non-Isolated DC/DC Converters 8-28Vin 5V 1.0A THRU", Case/Package=SIP, Current - Output 1=1A, Manufacturer=Recom, Max Input Voltage=28V, Max Operating Temperature=85°C, Max Output Voltage=5V, Max Power Dissipation=5W, Min Input Voltage=8V, Min Operating Temperature=-40°C, Package Quantity=42, Supplier Part Number 1=945-2201-ND, ComponentLink1Description=http://www.farnell.com/datasheets/2290573.pdf, ComponentLink1URL=http://www.farnell.com/datasheets/2290573.pdf, ComponentLink2Description=http://www.mouser.com/ds/2/468/R-78Exx-1.0-958279.pdf, ComponentLink2URL=http://www.mouser.com/ds/2/468/R-78Exx-1.0-958279.pdf, ComponentLink3Description=https://www.recom-power.com/pdf/Innoline/R-78Exx-1.0.pdf, ComponentLink3URL=https://www.recom-power.com/pdf/Innoline/R-78Exx-1.0.pdf, Efficiency=91%, Height=10.4mm, Lead Free="Lead Free", Length=11.6mm, Manufacturer Part Number=R-78E5.0-1.0, Max Output Current=1A, Mount="Through Hole", Number of Outputs=1, Output Power=5W, Packaging=Rail/Tube, Pricing 1="1=3.26, 5=3.208, 10=3.162, 25=3.0692, 50=2.976, 100=2.883, 250=2.79, 500=2.604 (USD)", Stock 1=12508, Supplier 1=Digi-Key, Voltage - Output 1=5V, Weight=2g, Width=8.5mm
U5: "IC INVERTER DUAL SCHMITT SC70-6", Case/Package=SC, High Level Output Current=-32mA, Low Level Output Current=32mA, Manufacturer="ON Semiconductor / Fairchild", Max Operating Temperature=85°C, Max Supply Voltage=5.5V, Min Operating Temperature=-40°C, Min Supply Voltage=1.65V, Package Quantity=3000, Quiescent Current=1uA, Supplier Part Number 1=NC7WZ14P6XTR-ND, ComponentLink1Description=https://datasheet.ciiva.com/4827/nc7wz14-116143-4827508.pdf, ComponentLink1URL=https://datasheet.ciiva.com/4827/nc7wz14-116143-4827508.pdf, ComponentLink2Description=https://datasheet.ciiva.com/28416/1725703-28416486.pdf, ComponentLink2URL=https://datasheet.ciiva.com/28416/1725703-28416486.pdf, ComponentLink3Description=https://datasheet.ciiva.com/34301/874592-34301639.pdf, ComponentLink3URL=https://datasheet.ciiva.com/34301/874592-34301639.pdf, ComponentLink4Description=https://datasheet.ciiva.com/1861/nc7wz14-1861995.pdf, ComponentLink4URL=https://datasheet.ciiva.com/1861/nc7wz14-1861995.pdf, ComponentLink5Description=https://datasheet.ciiva.com/1861/nc7wz14-1861996.pdf, ComponentLink5URL=https://datasheet.ciiva.com/1861/nc7wz14-1861996.pdf, ComponentLink6Description=https://datasheet.ciiva.com/8248/nc7wz14-8248844.pdf, ComponentLink6URL=https://datasheet.ciiva.com/8248/nc7wz14-8248844.pdf, ComponentLink7Description=https://datasheet.ciiva.com/1861/nc7wz14-1861997.pdf, ComponentLink7URL=https://datasheet.ciiva.com/1861/nc7wz14-1861997.pdf, ComponentLink8Description=https://datasheet.ciiva.com/15089/getdatasheetpartid-110323-15089229.pdf, ComponentLink8URL=https://datasheet.ciiva.com/15089/getdatasheetpartid-110323-15089229.pdf, ComponentLink9Description=https://datasheet.ciiva.com/8248/nc7wz14-8248846.pdf, ComponentLink9URL=https://datasheet.ciiva.com/8248/nc7wz14-8248846.pdf, ComponentLink10Description=https://datasheet.ciiva.com/25628/0900766b80d1df42-25628686.pdf, ComponentLink10URL=https://datasheet.ciiva.com/25628/0900766b80d1df42-25628686.pdf, Contact Plating=Tin,Matte, Height=1mm, Lead Free="Lead Free", Length=2mm, Logic Function="Schmitt Trigger,Buffer,Inverter", Manufacturer Part Number=NC7WZ14P6X, Mount="Surface Mount", Number of Circuits=2, Number of Elements=2, Number of Gates=2, Number of Inputs=1, Number of Pins=6, Output Current=32mA, Packaging="Tape and Reel", Propagation Delay=4.9ns, Radiation Hardening=No, REACH SVHC="No SVHC", Schmitt Trigger Input=Yes, Stock 1=0, Supplier 1=Digi-Key, Turn-On Delay Time=14.5ns, Weight=0.028g, Width=1.25mm

## Via types
v1: diameter 0.9, hole 0.6, Top Layer to Bottom Layer, 30 vias

## Nets (pads, with @x,y where several pads share a name; then routed paths per layer and width w, separated by ;. In a path a pad name is that pad's centre, name@x,y a point inside that pad or via, vN(x,y) a via of type N, cw(c..) or ccw(c..) an arc to the next point about the centre after c; other vN are vias at no path point)
+5V: C8.2 R2.2 U3.1 U3.16 U4.3 U5.5 | length 35.5
  Top Layer w0.3: U3.1 54.323,50.323 57.1,53.1 60.8,53.1 ; U3.16 59.723,50.323 60.8,51.4 60.8,53.1 ; C8.2 60.8,53.1 ; v1(63.4,49.4) 63.8,49 63.8,47.6 64.3,47.1 U5.5
  Top Layer w1: U4.3 C8.2 v1(62.8,55.7) 63.7,54.8 R2.2
  Bottom Layer w0.3: v1(62.8,55.7) 62.8,50.2 62.7,50.1 v1(63.4,49.4)
+12V: C1.1 C2.1 C3.2 C4.2 C7.2 D1.1 D2.1 D3.2 D4.2 D7.2 J1.1 J1.9 Q1.2 Q3.2 R1.2 U1.1 U1.10 U2.1 U2.10 U4.1 | length 134.2
  Top Layer w0.254: R1.2 28.15,30.95 28.5,31.3 J1.9 ; D2.1 74,42.4 73.4,41.8 73.4,40.335 U2.1 74.79,40.21 75.8,39.2 75.8,36.2 76.87,35.13 U2.10 ; D1.1 74.1,68.9 73.275,68.075 U1.1 74.89,66.81 76,65.7 76,63.1 77.37,61.73 U1.10
  Top Layer w0.5: 26.2,61.3 26.2,36.7 28,34.9 J1.9 D7.2@36.2,34.9 ; v1(67.1,40.3) 69.7,40.3 C4.2 73.265,40.2 U2.1
  Top Layer w1: 31.8,61.8 31.8,59.5 34.5,56.8 41.34,56.8 42.34,55.8 C7.2 51.02,55.8 U4.1
  Bottom Layer w0.5: v1@67.1,40.2 v1(67.1,40.3) 67.1,43.3 69.2,45.4 v1(69.2,73)
EM_NEGATIVE: D7.1 D8.2 J1.8 Q5.2 | length 31.1
  Top Layer w0.254: D8.2 35.05,27.75 36.7,29.4 D7.1
  Top Layer w1: J1.8 41.811,38.389 42,38.2 Q5.2 42,31.1 D7.1
GND: C1.2 C2.2 C3.1 C4.1 C7.1 C8.1 D5.1 D6.1 J1.2 Q2.3 Q4.3 Q5.3 R2.1 R3.1 U1.5 U1.6 U2.5 U2.6 U3.2 U3.8 U3.9 U3.15 U4.2 U5.2
  other v1: 100.3,27 102.4,27 104.5,27 117.8,27 119.9,27 122,27 101.5,28.6 103.4,28.6 119,28.6 120.9,28.6 100.3,30.2 102.4,30.2 104.5,30.2 117.8,30.2 119.9,30.2 122,30.2
HS_1_PWM_IN: U1.2 U3.14 U5.1 | length 33.7
  Top Layer w0.254: U3.14 59.948,49.053 ; U5.1 61.25,47.75 59.948,49.053 ; U1.2 74.56,65.54 75,65.1 75,55.5 70.9,51.4 62.3,51.4 59.953,49.053 59.948,49.053
HS_2_PWM_IN: U2.2 U3.12 U5.3 | length 24.1
  Top Layer w0.254: U3.12 59.517,47.783 60.85,46.45 U5.3 62.5,38.4 63.2,37.7 67.1,37.7 68.34,38.94 U2.2
LS_1_PWM_IN: JP2.1 U3.13 | length 17
  Top Layer w0.254: v1(56.918,48.418) U3.13
  Bottom Layer w0.254: v1(56.918,48.418) 56.918,49.318 57.4,49.8 58.8,49.8 61.1,52.1 61.1,56.62 JP2.1
LS_2_PWM_IN: JP1.3 U3.11 | length 17.1
  Top Layer w0.254: U3.11 59.352,47.148 60,46.5 60,45.3 60.8,44.5 60.8,35.6 62.58,33.82 JP1.3
M+: D3.1 D5.2 J2.2 Q1.3 Q2.2
  other v1: 102.1,49.8 104.5,49.8 102.1,51.8 104.5,51.8
M-: D4.1 D6.2 J2.1 Q3.3 Q4.2
MAGNET_SIGNAL: J1.7 Q5.1 R3.2 | length 37.3
  Top Layer w0.254: J1.7@28.5,42.1 42.5,42.1 46.6,38 46.6,34.1 48.9,31.8 53.11,31.8 53.15,31.76
  Top Layer w0.5: 53.15,31.76 Q5.1 59.16,31.76 R3.2
MCU_PWM_1: J1.3 U3.3 | length 27.6
  Top Layer w0.254: J1.3@28.5,56.1 32.7,51.9 46.2,51.9 49.047,49.053 U3.3
MCU_PWM_2: J1.4 U3.4 | length 26.4
  Top Layer w0.254: J1.4@28.5,52.6 30.9,50.2 44.6,50.2 46.382,48.418 U3.4
MCU_PWM_3: J1.5 U3.5 | length 25.2
  Top Layer w0.254: J1.5@28.5,49.1 29.817,47.783 U3.5
MCU_PWM_4: J1.6 U3.6 | length 25.3
  Top Layer w0.254: J1.6@28.5,45.6 50.3,45.6 51.848,47.148 U3.6
NetC5_1: C5.1 U1.11 | length 5.4
  Top Layer w0.254: U1.11 82.2,63 82.7,63.5 C5.1
NetC5_2: C5.2 D1.2 U1.14 | length 7
  Top Layer w0.254: D1.2 78.5,68.9 78.7,68.7 78.7,66.835 U1.14 80.79,66.81 81,66.6 C5.2
NetC6_1: C6.1 U2.11 | length 5.3
  Top Layer w0.254: U2.11 80.3,36.4 81.9,38 C6.1
NetC6_2: C6.2 D2.2 U2.14 | length 7.9
  Top Layer w0.254: D2.2 78.5,42.4 78.725,42.175 U2.14 81.69,40.21 82,39.9 C6.2
NetD8_1: D8.1 R1.1 | length 3.5
  Top Layer w0.254: R1.1 D8.1
NetJP1_2: JP1.2 U2.3 | length 9.5
  Top Layer w0.254: JP1.2 68.76,36.36 70.07,37.67 U2.3
NetJP2_2: JP2.2 U1.3 | length 9.8
  Top Layer w0.254: JP2.2 66.96,62.36 68.87,64.27 U1.3
NetQ1_1: Q1.1 U1.12 U1.13 | length 19.6
  Top Layer w0.254: U1.12 U1.13 86.36,65.54 90.86,61.04 Q1.1
NetQ2_1: Q2.1 U1.8 U1.9 | length 39.9
  Top Layer w0.254: U1.9 U1.8 78.735,59.2 v1(80.6,59.2) ; v1(87.4,29.5) 90.91,29.5 Q2.1
  Bottom Layer w0.254: v1(80.6,59.2) 81.7,59.2 82.3,58.6 82.3,34.6 v1(87.4,29.5)
NetQ3_1: Q3.1 U2.12 U2.13 | length 44.1
  Top Layer w0.254: U2.12 U2.13 v1@85.7,38.94 ; v1(106.8,56.5) 108.91,56.5 Q3.1
  Bottom Layer w0.254: v1(85.7,39) 85.7,47.6 94.6,56.5 v1(106.8,56.5)
NetQ4_1: Q4.1 U2.8 U2.9 | length 38.9
  Top Layer w0.254: U2.9 U2.8 78.725,31.975 85.3,25.4 108.9,25.4 109.16,25.66 Q4.1
PWM1_INVERTED: JP2.3 U5.6 | length 19.2
  Top Layer w0.254: U5.6 v1(65.3,49)
  Bottom Layer w0.254: JP2.3 65.6,64.9 66.4,64.1 66.4,51.5 65.3,50.4 v1(65.3,49)
PWM2_INVERTED: JP1.1 U5.4 | length 8
  Top Layer w0.254: JP1.1 64.3,40.9 65.3,41.9 U5.4
pads on no net: U1.4 U1.7 U2.4 U2.7 U3.7 U3.10

## Polygon pours and split planes (outlines as drawn)
+12V on Top Layer "+12V" (solid, remove dead copper, pour order 10): 86.1,66.1 56.5,66.1 51.2,71.4 43.5,71.4 33.4,61.3 29.7,61.3 25.8,61.3 25,62.1 25,75 86.1,75
M- on Top Layer "M-" (solid, remove dead copper, pour order 8): 118.85,52.75 118.85,50.05 119.9,49 122.3,49 123.6,47.7 123.6,37.7 122.4,36.5 107.2,36.5 106,37.7 106,48.9 109.7,52.6 111.9,54.8 111.9,61.6 115,64.7 122.9,64.7 122.9,64.6 123.9,63.6 123.9,57.8
M+ on Top Layer "M+" (solid, remove dead copper, pour order 6): 93.4,51.5 91.3,49.4 88.7,49.4 86.6,47.3 86.6,37.7 87.8,36.5 98,36.5 104.5,36.5 105.7,37.7 105.7,63.8 104.5,64.7 95.4,64.7 93.4,62.7
+12V on Top Layer "+12V" (solid, remove dead copper, pour order 4): 122.8,65 123.9,66.1 123.9,75.05 85.9,74.95 85.9,66.2 87.1,65
GND on Top Layer "GND" (solid, remove dead copper, pour order 2): 123.6,26.1 123.3,25.8 86,25.8 84.8,27 84.8,34.6 86.4,36.2 122.5,36.2 123.6,35.1
GND on Top Layer "GND" (solid, remove dead copper, pour order 0): 26.714,60.8 26.714,36.486 38.1,25.1 40.7,25 81.5,25 81.5,69.175 78.125,65.8 62.9,65.8 56.3,65.8 51,71.1 43.7,71.1 33.4,60.8
GND on Bottom Layer "GND" (solid, remove dead copper, pour order 14): 101.1,34.9 121.9,34.9 123.6,33.2 123.6,26.2 122.3,24.9 122.2,25 100.8,25 25,25 25,75 81.5,75 81.5,36.7 83.3,34.9
M+ on Bottom Layer "M+" (solid, remove dead copper, pour order 12): 109.95,52.8 121.95,52.8 122.95,51.8 122.95,49.5 122.15,48.7 101.65,48.7 100.95,49.4 100.95,52.1 101.65,52.8

## Silkscreen, mask and mechanical layers (free items; w line width, h text height)
Top Overlay:
  text "+12V" at 26.2,65.5 h1.52
  text "GND" at 33.75,58.625 h1.52
  text "PWM1" at 33.9,54.8 h1.52
  text "PWM2" at 33.9,51.2 h1.52
  text "M+" at 113,50.3 h1.52
  text "H-BRIDGE" at 97.5,49.2 h1.52
  text "PWM3" at 33.9,47.7 h1.52
  text "M-" at 113.1,46.4 h1.52
  text "PWM4" at 34,44.2 h1.52
  text "MG_SIG" at 34.1,40.9 h1.52
  text "EM-" at 34.1,37.6 h1.52
  text "EM+" at 26.2,30.3 h1.52
  text "ELECTROMAGNET" at 37.6,26 h1.52
Bottom Overlay:
  lines w0.2: 30.9,28.7 71.2,28.7 ; 59.6,26.4 59.6,31.3 ; 71.2,31.2 71.1,31.3 30.9,31.3 30.9,26.4 71.2,26.4 71.2,31.3
  text "Short upper jumper positions" at 58.6,29.7 h1
  text "2-PWM MODE" at 70.4,29.6 h1
  text "Short lower jumper positions" at 58.6,27 h1
  text "4-PWM MODE" at 70.4,27 h1
Mechanical 1:
  the board outline again, w0.2